# Altium PCB PCB1.PcbDoc
Units mil, origin at the board's own origin, x right, y up, seen from the top; angles counter-clockwise.
Board outline 6000 x 4000 mil, 2 copper layers (Top Layer, Bottom Layer); 11 components, 9 nets, 59 pads, 6 vias.
Unrouted connection lines stored in the file: 11.
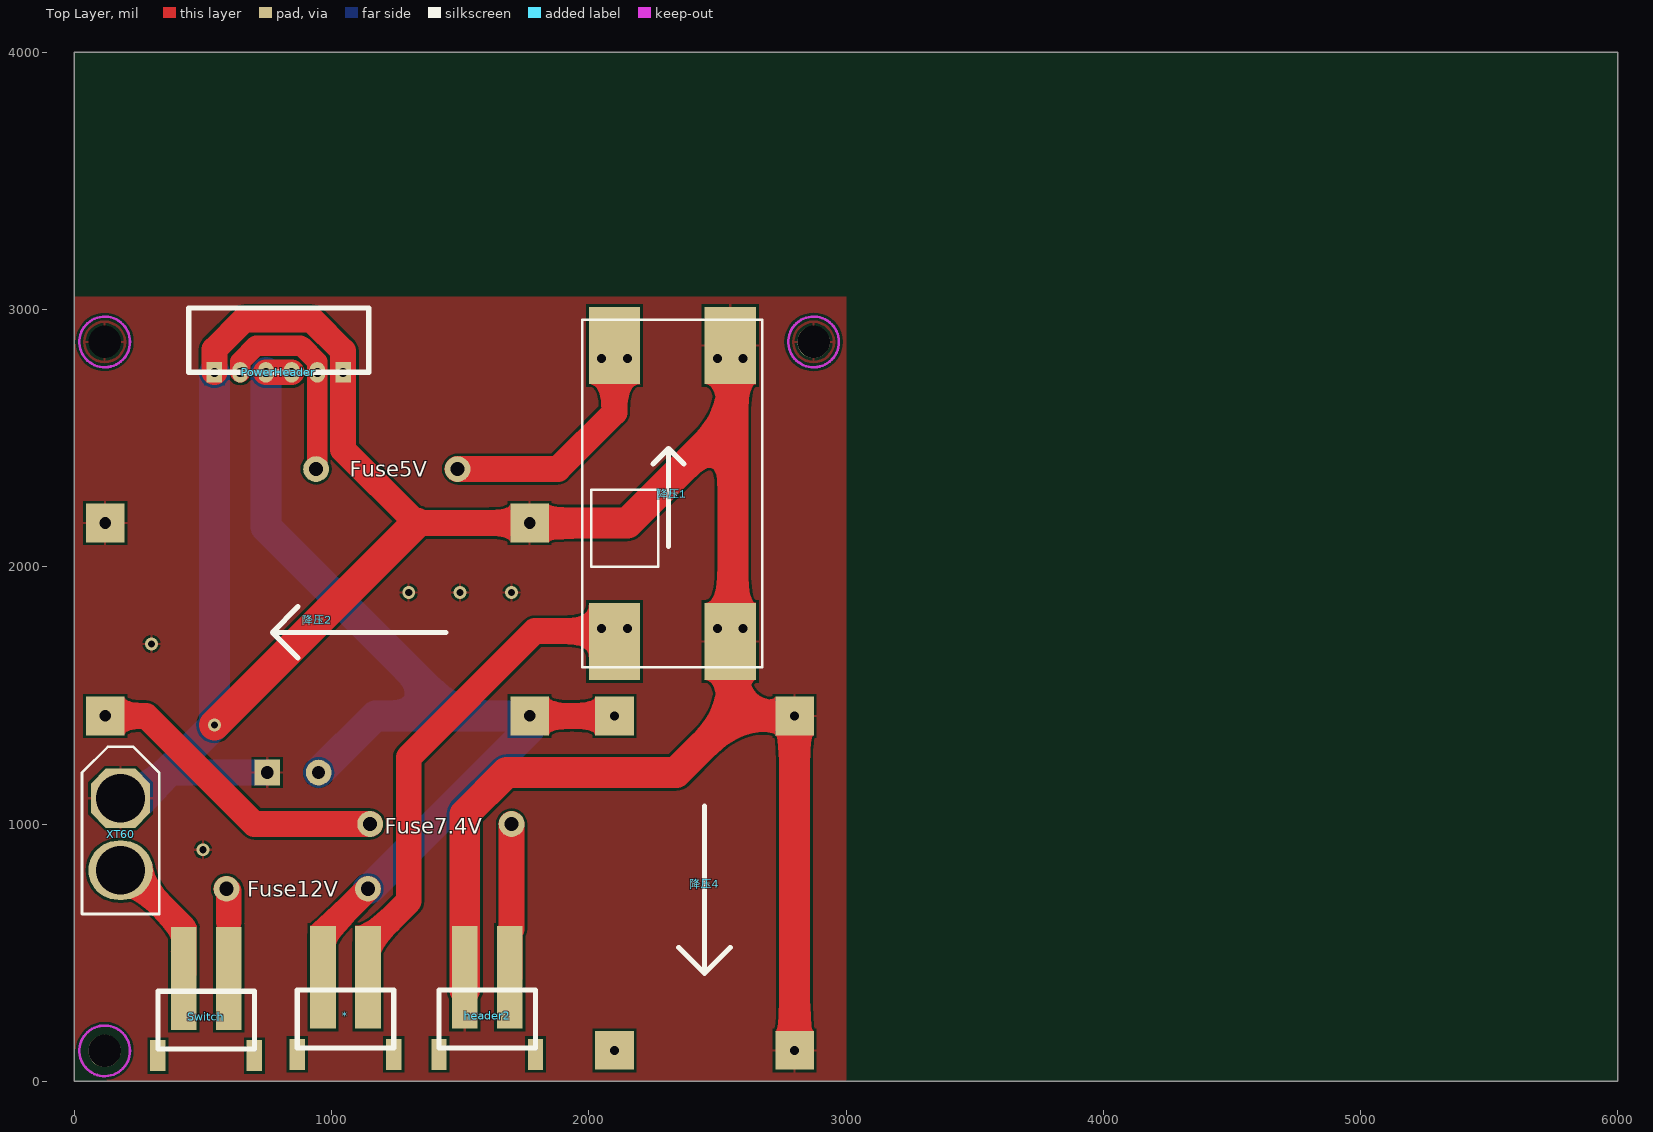
[diagram p0: Top Layer view]
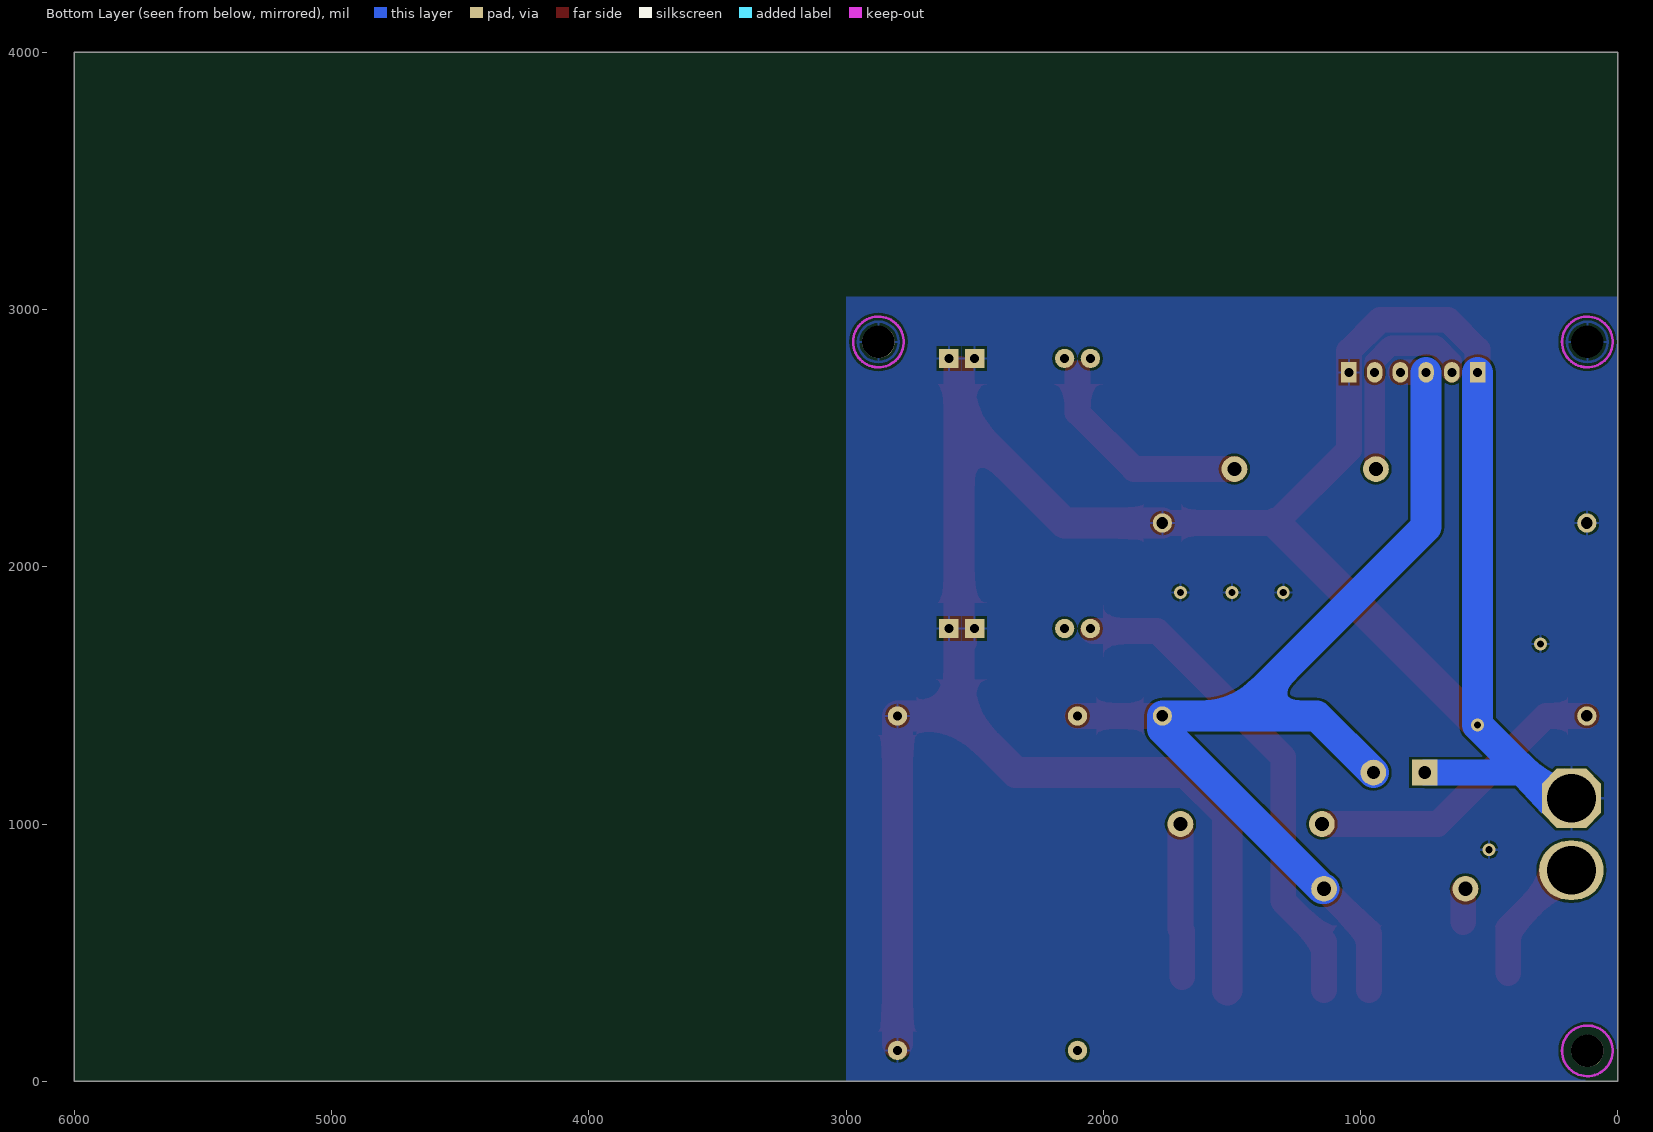
[diagram p1: Bottom Layer view, seen from below]

## Layer stack, top to bottom
Top Solder: solder mask 0.4, Solder Resist, Dk 3.5
Top Layer: signal copper 1.4
Dielectric 1: dielectric 12.6, FR-4, Dk 4.8
Bottom Layer: signal copper 1.4
Bottom Solder: solder mask 0.4, Solder Resist, Dk 3.5

## Board outline
0,0 6000,0 6000,4000 0,4000

## Design rules (kind name [scope] priority, off if disabled: settings)
Clearance [All] p1: gap=10 ignorepadtopadclearanceinfootprint=FALSE except(0: Arc-Hole Track-Hole SMDPad-Hole THPad-Hole Via-Hole Fill-Hole Poly-Hole Region-Hole Text-Hole)
PlaneConnect [All] p1: planeconnectstyle=Relief reliefexpansion=30 reliefentries=4 reliefconductorwidth=30 reliefairgap=30
PolygonConnect [All] p1: connectstyle=Relief reliefconductorwidth=10 reliefentries=4 polygonreliefangle="90 Angle" airgapwidth=10
RoutingVias [All] p1: holewidth=28 width=50 viastyle="Through Hole" minholewidth=28 minwidth=50 maxholewidth=28 maxwidth=50
SolderMaskExpansion [All] p1: expansion=4 istentingtop=FALSE
Width [All] p1: maxlimit=150 minlimit=10 preferedwidth=10 minimp=50.000000 maximp=50.000000 favimp=50.000000
29 further rules are at their usual default settings.

## Components (designator, comment, footprint, x,y, rotation, side; value= is the part's Value field where it differs from the comment)
* "SwitchFree" SWITCHFREE 966.73,354.33 r90 top
Fuse5V "保险丝" FUSE 1490,2380 r180 top
Fuse7.4V "" FUSE 1150,1000 r0 top
Fuse12V "保险丝" FUSE 591.73,748.03 r0 top
header2 "header2" HEADER2 1517.91,354.33 r90 top
PowerHeader "PowerHeader" PowerHeader 1044.88,2755.91 r270 top
Switch "SwitchFree" SWITCHFREE 425,350 r90 top
XT60 "XT60" XT60 180,1100 r270 top
降压1 "降压模块" 贴片1 2100,1710 r90 top
降压2 "降压模块" XL4015 1770,1420 r180 top
降压4 "降压模块" 贴片4-USB 2100,120 r90 top

## Footprints (in the part's own frame and the unit in brackets; to place one, negate y for a bottom-side part, rotate by r counter-clockwise, add the part's x,y. Pads: shape width x height; smd on the part's side, far side on the other; paste and mask are expansions set on the pad)
FUSE [mil] "保险丝"
  round 100 hole 55: V+(0,0) V-(550,0)
HEADER2 [mil]
  rect 400x100 smd: 7.4V(50,-175) GND(50,0)
  rect 120x60 smd: none(-250,100) none(-250,-275)
  silkscreen extent -225,-275 0,100
PowerHeader [mil]
  oval 80x60 hole 35: 5V(0,-100) 5V(0,-400) 12V(0,-200) 12V(0,-300)
  rect 80x60 hole 35: GND(0,0) GND(0,-500)
  silkscreen extent -250,-600 0,100
SWITCHFREE [mil]
  rect 120x60 smd: none(-250,100) none(-250,-275)
  rect 400x100 smd: V+(50,0) V-(50,-175)
  silkscreen extent -225,-275 0,100
XL4015 [mil]
  rect 150x150 smd: IN+(0,0) IN-(0,-750) OUT+(1650,0) OUT-(1650,-750)
  round 75 hole 45: IN+(0,0) IN-(0,-750) OUT+(1650,0) OUT-(1650,-750)
  silkscreen extent 325,-425 1000,-225
XT60 [mil]
  oval 230x250 hole 190: V+(280,0)
  oct 230x230 hole 190: V-(0,0)
  silkscreen extent -200,-150 450,150
贴片1 [mil]
  rect 300x200 smd: IN+(0,0) IN-(0,-450) OUT+(1150,0) OUT-(1150,-450)
  round 75 hole 35: IN+(50,-50) IN+(50,50) OUT+(1100,-50) OUT+(1100,50)
  rect 75x75 hole 35: IN-(50,-400) IN-(50,-500) OUT-(1100,-500) OUT-(1100,-400)
  silkscreen extent -100,-575 1250,125
贴片4-USB [mil]
  rect 150x150 smd: IN+(1300,0) IN-(1300,-700) OUT+(0,0) OUT-(0,-700)
  round 75 hole 35: IN+(1300,0) IN-(1300,-700) OUT+(0,0) OUT-(0,-700)
  silkscreen extent 300,-450 950,-250

## Part data
Fuse5V Fuse12V: library part Fuse
Fuse7.4V: library part Fuse, "保险丝"
降压1: library part 降压_1
降压2: library part 降压2, "XL4015"
降压4: library part 降压_4

## Free pads (board coordinates)
  round 125.98 hole 125.98: 256(118.11,118.11) 259(2874.02,2874.02)
  round 98.43 hole 125.98: 258(118.11,2874.02)
  rect 100x100 hole 50: 263(750,1200)
  round 100 hole 50: 264(950,1200)

## Via types
v1: diameter 50, hole 28, Top Layer to Bottom Layer, 6 vias

## Nets (pads, with @x,y where several pads share a name; then routed paths per layer and width w, separated by ;. In a path a pad name is that pad's centre, name@x,y a point inside that pad or via, vN(x,y) a via of type N, cw(c..) or ccw(c..) an arc to the next point about the centre after c; other vN are vias at no path point)
7.4V: Fuse7.4V.V+ 降压2.OUT+ | length 1204
  Top Layer w100: 降压2.OUT+@120,1420 280,1420 700,1000 Fuse7.4V.V+
+5: Fuse5V.V+ 降压1.OUT+ | length 852.7
  Top Layer w100: Fuse5V.V+ 1880,2380 2100,2600 降压1.OUT+@2100,2751.55
+12: *.V+ Fuse12V.V- pad.264 PowerHeader.12V 降压2.IN+ 降压4.IN+ | length 4383.6
  Top Layer w100: PowerHeader.12V@744.88,2755.91 PowerHeader.12V@844.88,2755.91 ; *.V+@966.73,354.33 *.V+ 966.73,573.03 Fuse12V.V- ; 降压2.IN+@1770,1420 降压4.IN+@2100,1420
  Bottom Layer w120: PowerHeader.12V@744.88,2755.91 744.88,2155.12 1480,1420 ; pad.264 1170,1420 1480,1420 ; Fuse12V.V- 1148.03,748.03 1770,1370 1770,1420 1480,1420
GND: header2.GND pad.258 pad.259 pad.263 PowerHeader.GND XT60.V- 降压1.IN- 降压1.OUT- 降压2.IN- 降压2.OUT- 降压4.IN- 降压4.OUT- | length 10983.6
  Top Layer w100: PowerHeader.GND@544.88,2755.91 544.88,2844.88 660,2960 923.63,2960 1044.88,2838.75 1044.88,2455.12 1330,2170 降压2.IN-@1770,2170
  Top Layer w120: v1(544.88,1384.88) 1330,2170 ; header2.GND@1517.91,354.33 1517.91,1037.91 1680,1200 2340,1200 2560,1420 ; 降压2.IN-@1770,2170 2150,2170 2560,2580 ; 降压1.OUT-@2560,2760 2560,2580 ; 降压4.OUT-@2800,146.45 2800,1420 2560,1420 ; 2560,1420 2560,1700 2550,1710 2560,1720 2560,2580
  Bottom Layer w100: 350,1200 pad.263
  Bottom Layer w120: XT60.V- 212.65,1132.65 292.65,1132.65 v1(544.88,1384.88) PowerHeader.GND@544.88,2755.91
  other v1: 500,900 300,1700 1300,1900 1500,1900 1700,1900
Net*_V-: *.V- 降压1.IN+ | length 1914.2
  Top Layer w100: *.V-@1141.73,354.33 1141.73,541.73 1300,700 1300,1260 1790,1750 降压1.IN+@2040,1750
NetFuse5V_V-: Fuse5V.V- PowerHeader.5V | length 810.7
  Top Layer w80: PowerHeader.5V@644.88,2755.91 644.88,2797.33 707.56,2860 878.58,2860 882.67,2855.91 886.3,2855.91 944.88,2797.33 Fuse5V.V-@944.88,2380
NetFuse7.4V_V-: Fuse7.4V.V- header2.7.4V | length 598.6
  Top Layer w100: header2.7.4V 1692.91,583.62 1700,590.71 Fuse7.4V.V-
NetFuse12V_V+: Fuse12V.V+ Switch.V- | length 132.2
  Top Layer w100: Fuse12V.V+ 600,739.76 600,619.29
NetSwitch_V+: Switch.V+ XT60.V+ | length 503.2
  Top Layer w100: XT60.V+@190,820 200,820 425,595 Switch.V+@425,420
pads on no net: *.none header2.none Switch.none 降压4.OUT+

## Polygon pours and split planes (outlines as drawn)
GND on Bottom Layer "GND_L02_P-001" (solid, remove dead copper, pour order 1): 0,3050 3000,3050 3000,0 0,0
GND on Top Layer "GND_L02_P-001" (solid, remove dead copper, pour order 2): 0,3050 0,0 3000,0 3000,3050

## Keep-outs
Keep-Out Layer:
  circle w10: c118.11,118.11 r98.43
  circle w10: c118.11,2874.02 r98.43
  circle w10: c2874.02,2874.02 r98.43

## Silkscreen, mask and mechanical layers (free items; w line width, h text height)
Mechanical 1:
  lines w20: 0,0 3000,0 3000,3050 0,3050 0,0